# Altium PCB tps54332_12v_to_7v.PcbDoc
Units mil, origin at the board's own origin, x right, y up, seen from the top; angles counter-clockwise.
Board outline 2000 x 2000 mil, 4 copper layers (Top Layer, MidLayer1, MidLayer2, Bottom Layer); 19 components, 10 nets, 41 pads, 30 vias.
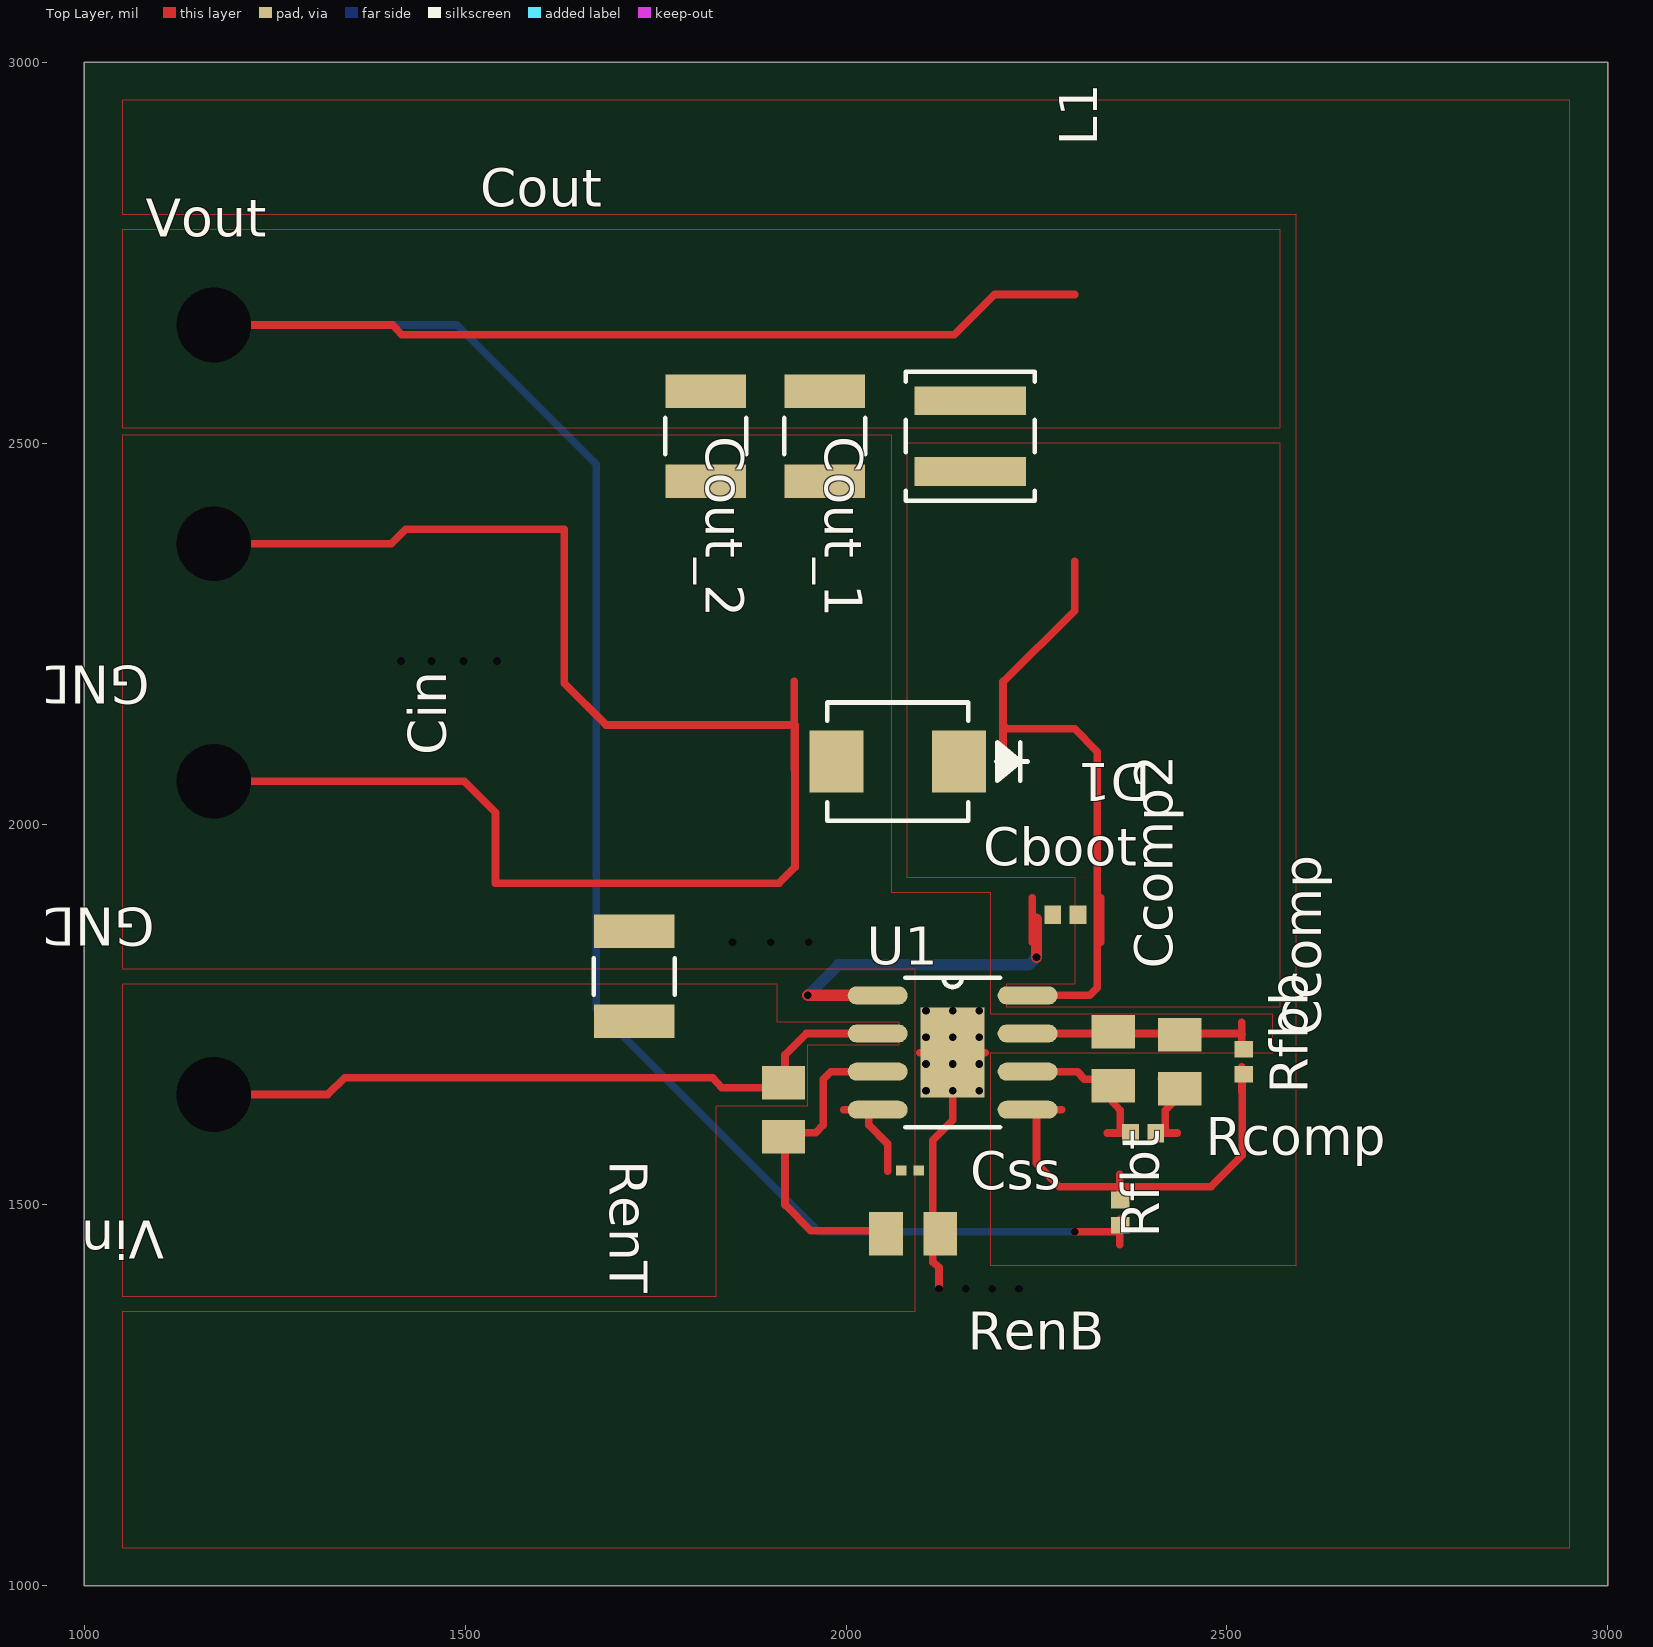
[diagram p0: Top Layer view]
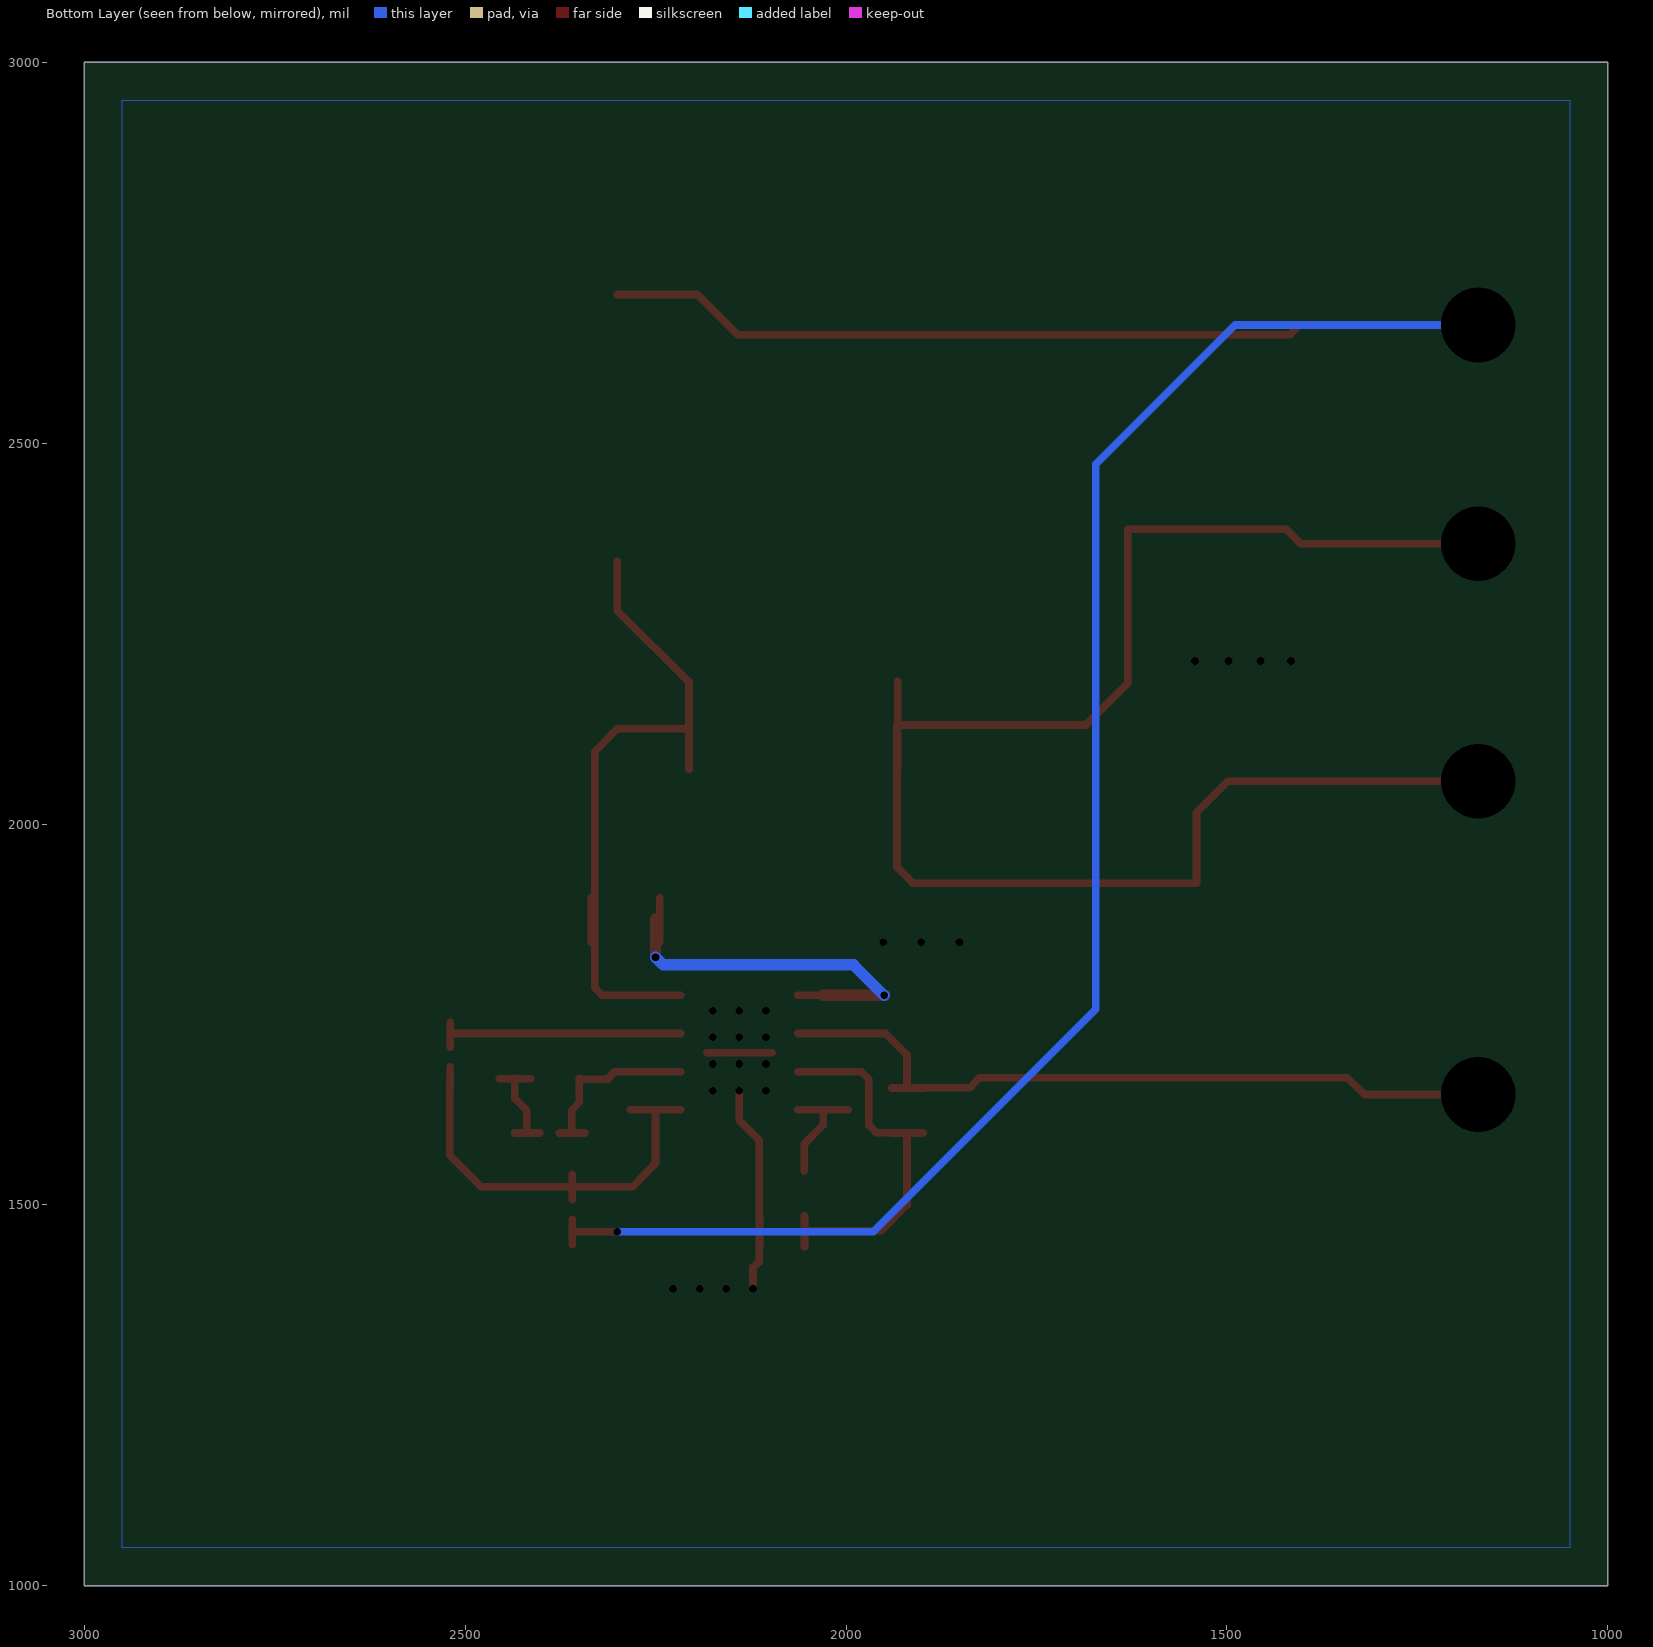
[diagram p1: Bottom Layer view, seen from below]

## Layer stack, top to bottom
Top Layer: signal copper 1.4
Dielectric: core 12.6, FR-4, Dk 4.8
MidLayer1: signal copper 1.4
Dielectric: prepreg 12.6, FR-4, Dk 4.8
MidLayer2: signal copper 1.4
Dielectric: core 12.6, FR-4, Dk 4.8
Bottom Layer: signal copper 1.4

## Board outline
1000,1000 3000,1000 3000,3000 1000,3000

## Design rules (kind name [scope] priority, off if disabled: settings)
PlaneConnect [All] p0: scope1count=1 scope1_0_kind=Board scope1_0_value=Board scope2count=1 scope2_0_kind=Board scope2_0_value=Board commentlength=0 planeconnectstyle=Direct reliefexpansion=20 reliefentries=4 reliefconductorwidth=10 reliefairgap=10
PlaneConnect [All] p1: planeconnectstyle=Direct reliefexpansion=20 reliefentries=4 reliefconductorwidth=10 reliefairgap=10
PolygonConnect [All] p0: scope1count=1 scope1_0_kind=Board scope1_0_value=Board scope2count=1 scope2_0_kind=Board scope2_0_value=Board commentlength=0 connectstyle=Direct reliefconductorwidth=10 reliefentries=4 polygonreliefangle="90 Angle"
PolygonConnect [All] p1: connectstyle=Direct reliefconductorwidth=10 reliefentries=4 polygonreliefangle="90 Angle"

## Components (designator, comment, footprint, x,y, rotation, side; value= is the part's Value field where it differs from the comment)
Cboot "" 0402 2288,1881 r0 top
Ccomp "" 0805 2438,1688 r90 top
Ccomp2 "" 0805 2351,1692 r90 top
Cin "" 1210 1722,1800 r90 top
Cout_1 "" 1210 1972,2509 r270 top
Cout_2 "" 1210 1816,2509 r270 top
Css "" 0201 2084,1545 r0 top
D1 "" SMB 2068,2082 r180 top
GND "" TP-1502 1168,2055 r180 top
GND1 "" TP-1502 1168,2367 r180 top
L1 "" XAL4030 2163,2509 r90 top
Rcomp "" 0402 2390,1594 r0 top
RenB "" 0805 2088,1462 r0 top
RenT "" 0805 1918,1625 r270 top
Rfbb "" 0402 2522,1688 r90 top
Rfbt "" 0402 2360,1490 r90 top
U1 "" DDA0008H 2140,1700 r0 top
Vin "" TP-1502 1168,1644 r180 top
Vout "" TP-1502 1168,2655 r0 top

## Footprints (in the part's own frame and the unit in brackets; to place one, negate y for a bottom-side part, rotate by r counter-clockwise, add the part's x,y. Pads: shape width x height; smd on the part's side, far side on the other; paste and mask are expansions set on the pad)
0201 [mil]
  rect 14x13 smd: 1(-11.5,0) 2(11.5,0)
0402 [mil]
  rect 22x24 smd: 1(-16.5,0) 2(16.5,0)
0805 [mil]
  rect 44x57 smd: 1(-35.5,0) 2(35.5,0)
1210 [mil]
  rect 44x106 smd: 1(-59,0) 2(59,0)
  silkscreen extent -24,-53 24,53
DDA0008H [mm]
  oval 2x0.6 smd: 1(-2.5,1.905) 2(-2.5,0.635) 3(-2.5,-0.635) 4(-2.5,-1.905) 5(2.5,-1.905) 6(2.5,-0.635) 7(2.5,0.635) 8(2.5,1.905)
  rect 2.13x3 smd: 9(0,0)
  silkscreen extent -1.58,-2.49 1.58,2.49
SMB [mil]
  rect 71x81 smd: 1(-80.5,0) 2(80.5,0)
  silkscreen extent -171,-78 93,78
TP-1502 [mil]
  round 0 hole 32: 1(0,0)
XAL4030 [mil]
  rect 38x146 smd: 1(-46.5,0) 2(46.5,0)
  silkscreen extent -84,-84 84,84

## Via types
v1: diameter 0, hole 10, Top Layer to Bottom Layer, 26 vias
v2: diameter 0, hole 98, Top Layer to Bottom Layer, 4 vias

## Nets (pads, with @x,y where several pads share a name; then routed paths per layer and width w, separated by ;. In a path a pad name is that pad's centre, name@x,y a point inside that pad or via, vN(x,y) a via of type N, cw(c..) or ccw(c..) an arc to the next point about the centre after c; other vN are vias at no path point)
0: Ccomp2.2 Ccomp.2 Cin.2 Cout_1.2 Cout_2.2 Css.2 D1.2 GND1.1 GND.1 RenB.2 Rfbb.2 U1.7 U1.9 | length 2991.1
  Top Layer w10: v2(1170,2056) 1499,2056 1540,2015 1540,1922 1912,1922 1933,1943 1933,2130 1685,2130 1630,2185 1630,2387 1422,2387 1403,2368 v2(1170,2368) ; 1932,2072 1932,2187 ; 2097,1700 2183,1700 ; RenB.2@2113.5,1445 RenB.2@2113.5,1486 ; v1(2122,1390) 2122,1418 2114,1425 2114,1466 2114,1544 2114,1585 2140,1611 v1(2140,1650) ; U1.7@2217,1725 2283,1725 ; U1.7@2250,1725 2519,1725 2520,1724 ; Ccomp.2@2414,1724.5 Ccomp.2@2455,1724.5 ; Rfbb.2@2519.5,1707 2519.5,1740
  other v1: 2157,1390 2192,1390 2227,1390 2105,1650 2175,1650 2105,1685 2140,1685 2175,1685 2105,1720 2140,1720 2175,1720 2105,1755 2140,1755 2175,1755 1851,1845 1901,1845 1951,1845 1416,2214 1456,2214 1498,2214 1542,2214
1: Cin.1 RenT.1 U1.2 Vin.1 | length 1036.4
  Top Layer w10: v2(1170,1645) 1320,1645 1342,1667 1540,1667 1825,1667 1837,1654 1920,1654 1920,1697 1948,1725 U1.2@2030,1725 ; RenT.1@1899,1653.5 RenT.1@1940,1653.5 ; 1997,1725 U1.2@2063,1725
2: Ccomp2.1 Rcomp.1 U1.6 | length 278.3
  Top Layer w10: U1.6@2217,1675 2283,1675 ; U1.6@2250,1675 2304,1675 2313,1665 Ccomp2.1@2350,1665 ; 2343,1594.5 Rcomp.1@2376,1594.5 ; Ccomp2.1@2350,1666 Ccomp2.1@2350,1665 ; 2360,1595 2360,1624 2350,1635 Ccomp2.1@2350,1665
3: Css.1 L1.2 U1.4 | length 157.4
  Top Layer w10: 1997,1625 U1.4@2063,1625 ; U1.4@2030,1625 2030,1605 2055,1580 2055,1544
4: Cboot.2 D1.1 L1.1 U1.8 | length 1025.6
  Top Layer w10: 2206,2072 2206,2187 ; U1.8@2217,1775 2283,1775 ; U1.8@2250,1775 2320,1775 2330,1785 2330,1875 2330,2095 2300,2125 2211,2125 2206,2130 2206,2186 2300,2280 2300,2345 ; 2334.5,1845 2334.5,1903
5: Rfbb.1 Rfbt.2 U1.5 | length 602.1
  Top Layer w10: U1.5@2217,1625 2283,1625 ; U1.5@2250,1625 2250,1555 2280,1524 2360,1524 2479,1524 2520,1565 Rfbb.1@2520,1665 ; Rfbt.2@2359.5,1507 2359.5,1540 ; 2519.5,1648 Rfbb.1@2519.5,1681
6: Ccomp.1 Rcomp.2 | length 151.6
  Top Layer w10: Rcomp.2@2402,1594.5 2435,1594.5 ; Ccomp.1@2414,1665.5 Ccomp.1@2455,1665.5 ; 2419,1595 2419,1624 2435,1640 Ccomp.1@2435,1666
7: Cout_1.1 Cout_2.1 Rfbt.1 Vout.1 | length 3292.4
  Top Layer w10: v2(1170,2655) 1405,2655 1417,2642 1630,2642 2142,2642 2195,2695 2300,2695 ; v1(2300,1465) Rfbt.1@2360,1465 ; 2359.5,1448 Rfbt.1@2359.5,1481
  Bottom Layer w10: v2(1170,2655) 1489,2655 1672,2472 1672,1757 1964,1465 v1(2300,1465)
8: Cboot.1 U1.1 | length 574.7
  Top Layer w10: 1997,1775 U1.1@2063,1775 ; 2244.5,1845 2244.5,1903
  Top Layer w15: v1(1950,1775) U1.1@2030,1775 ; v1(2250,1825) 2250,1875
  Bottom Layer w15: v1(1950,1775) 1990,1815 2240,1815 v1(2250,1825)
16: RenB.1 RenT.2 U1.3 | length 570.4
  Top Layer w10: RenT.2@1899,1594.5 RenT.2@1940,1594.5 ; 1997,1675 U1.3@2063,1675 ; U1.3@2030,1675 1980,1675 1970,1665 1970,1605 1960,1595 1920,1595 1920,1500 1954,1466 RenB.1@2055,1466 ; RenB.1@2054.5,1445 RenB.1@2054.5,1486

## Polygon pours and split planes (outlines as drawn)
4 on Top Layer " " (solid, pour order 0): 2210,1760 2570,1760 2570,2500 2080,2500 2080,1930 2300,1930 2300,1790 2210,1790
7 on Top Layer " " (solid, pour order 1): 2570,2520 2570,2780 1050,2780 1050,2520
1 on Top Layer " " (solid, pour order 2): 1050,1380 1830,1380 1830,1630 1950,1630 1950,1710 2070,1710 2070,1740 1910,1740 1910,1790 1050,1790
0 on Top Layer " " (solid, pour order 4): 2950,1050 2950,2950 1050,2950 1050,2800 2590,2800 2590,1420 2190,1420 2190,1700 2560,1700 2560,1750 2190,1750 2190,1910 2060,1910 2060,2510 1050,2510 1050,1810 2090,1810 2090,1360 1050,1360 1050,1050
0 on Bottom Layer " " (solid, pour order 3): 2950,1050 2950,2950 1050,2950 1050,1050

## Other copper
Multi-Layer:
  the board outline again, w1

## Silkscreen, mask and mechanical layers (free items; w line width, h text height)
Top Overlay:
  text "Cout" at 1520,2810 h50